# Altium PCB agv_drv.PcbDoc (part 1 of 2)
Units mm, origin at the board's own origin, x right, y up, seen from the top; angles counter-clockwise.
Board outline 86 x 57 mm, 2 copper layers (Top Layer, Bottom Layer); 77 components, 81 nets, 398 pads, 169 vias.
Unrouted connection lines stored in the file: 11.
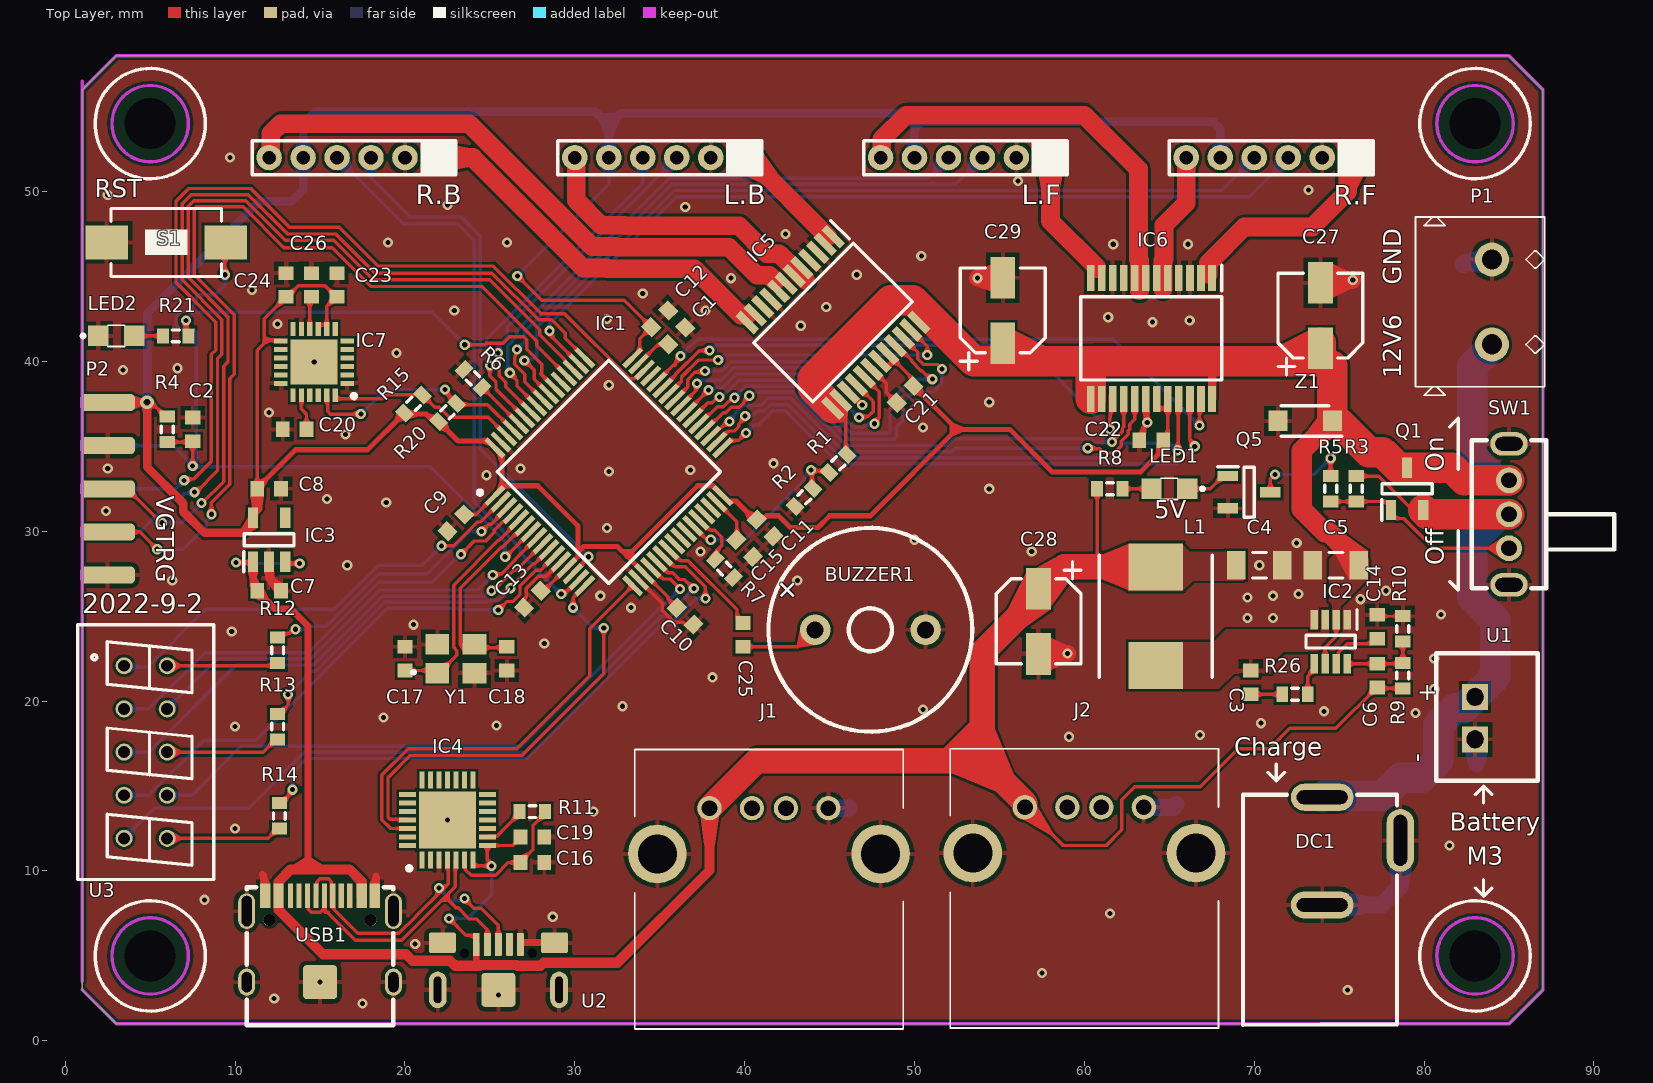
[diagram p0: Top Layer view]
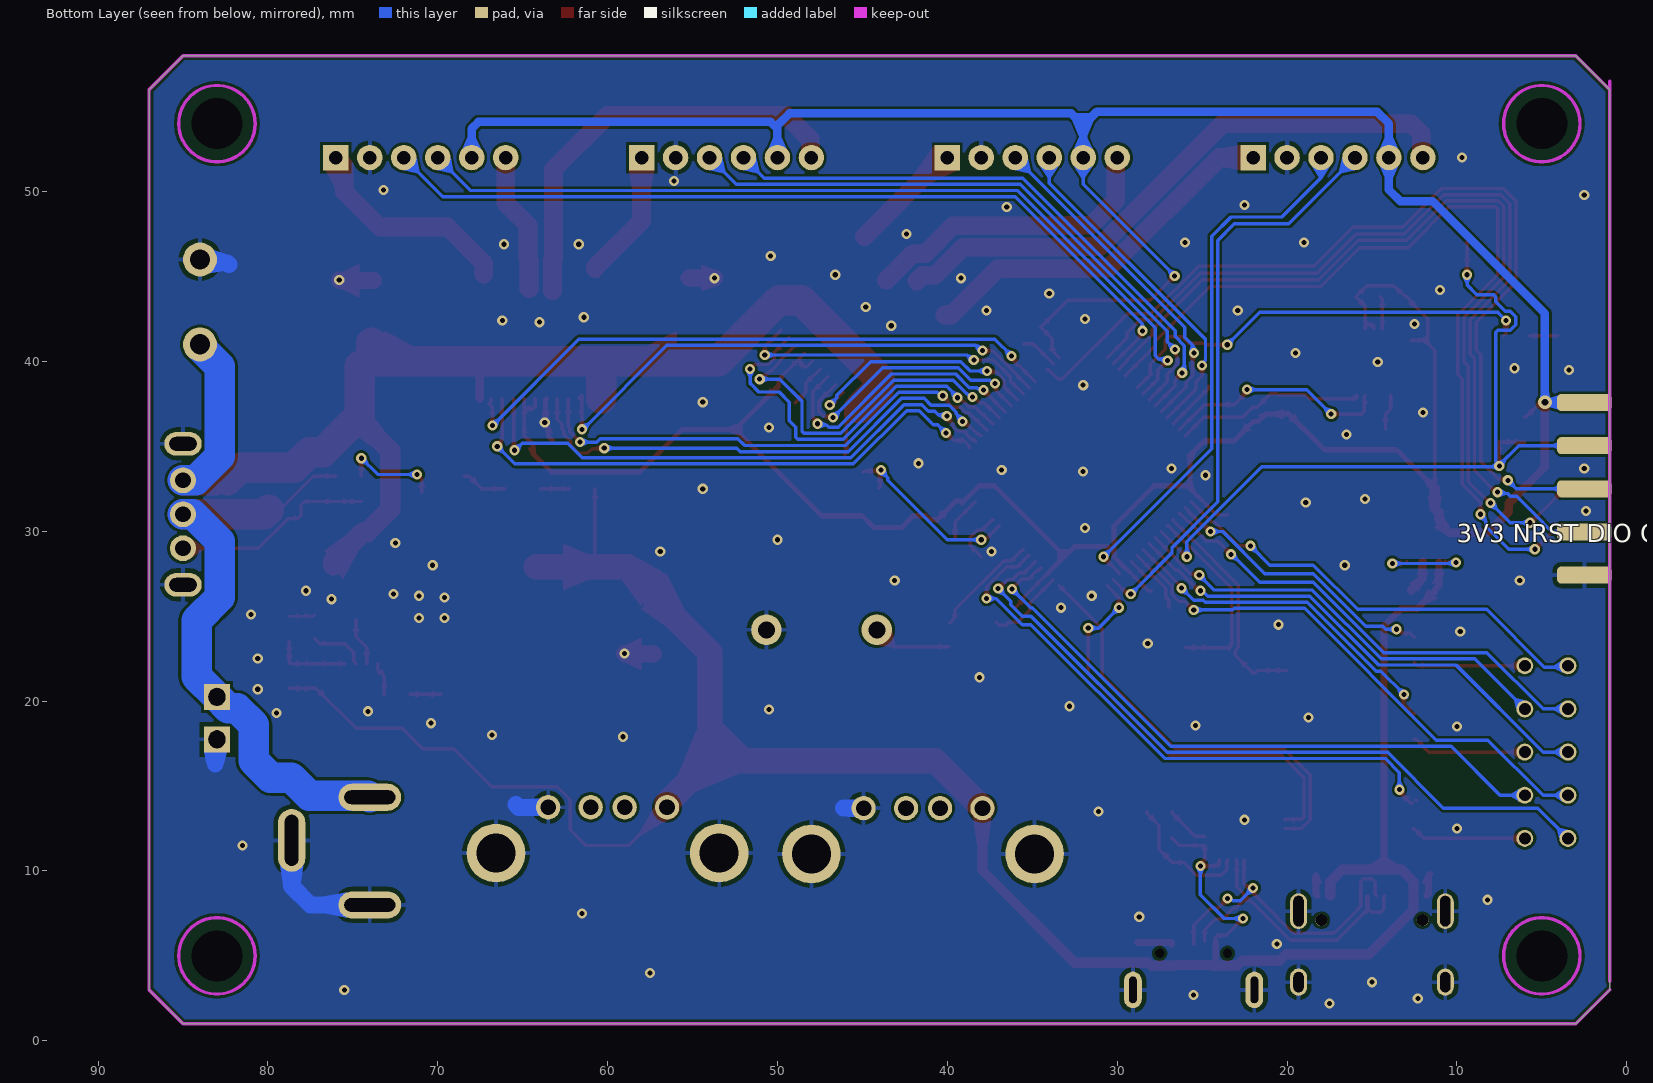
[diagram p1: Bottom Layer view, seen from below]

## Layer stack, top to bottom
Top Solder: solder mask 0.0102, Solder Resist, Dk 3.5
Top Layer: signal copper 0.0356
Dielectric 1: dielectric 0.32, FR-4, Dk 4.8
Bottom Layer: signal copper 0.0356
Bottom Solder: solder mask 0.0102, Solder Resist, Dk 3.5

## Board outline
1,3 1,56 3,58 85,58 87,56 87,3 85,1 3,1

## Design rules (kind name [scope] priority, off if disabled: settings)
Clearance [All] p1: gap=0.16 ignorepadtopadclearanceinfootprint=FALSE
DiffPairsRouting [All] p1: maxlimit=0.5 minlimit=0.16 mostfreqgap=0.2 toplayer_minwidth=0.16 toplayer_maxwidth=0.2 toplayer_prefwidth=0.2 bottomlayer_minwidth=0.16 bottomlayer_maxwidth=0.2 bottomlayer_prefwidth=0.2 maxuncoupledlength=12.7
PlaneConnect [All] p1: pad.planeconnectstyle=Relief pad.reliefexpansion=0.508 pad.reliefentries=4 pad.reliefconductorwidth=0.254 pad.reliefairgap=0.254 via.planeconnectstyle=Direct via.reliefexpansion=0.508 via.reliefentries=4 via.reliefconductorwidth=0.254 via.reliefairgap=0.254
PolygonConnect PolygonConnect_1 [HasFootprint('INDPM7266X300N')] p1: thpad.connectstyle=Relief thpad.reliefconductorwidth=0.254 thpad.reliefentries=4 thpad.polygonreliefangle="90 Angle" thpad.airgapwidth=0.254 smdpad.connectstyle=Direct smdpad.reliefconductorwidth=0.254 smdpad.reliefentries=4 smdpad.polygonreliefangle="90 Angle" smdpad.airgapwidth=0.254 via.connectstyle=Direct via.reliefconductorwidth=0.254 via.reliefentries=4 via.polygonreliefangle="90 Angle" via.airgapwidth=0.254
PolygonConnect PolygonConnect_2 [HasFootprint('C1206')] p2: thpad.connectstyle=Relief thpad.reliefconductorwidth=0.254 thpad.reliefentries=4 thpad.polygonreliefangle="90 Angle" thpad.airgapwidth=0.254 smdpad.connectstyle=Direct smdpad.reliefconductorwidth=0.254 smdpad.reliefentries=4 smdpad.polygonreliefangle="90 Angle" smdpad.airgapwidth=0.254 via.connectstyle=Direct via.reliefconductorwidth=0.254 via.reliefentries=4 via.polygonreliefangle="90 Angle" via.airgapwidth=0.254
PolygonConnect PolygonConnect_3 [HasFootprint('SOT65P280X100-8N')] p3: thpad.connectstyle=Relief thpad.reliefconductorwidth=0.254 thpad.reliefentries=4 thpad.polygonreliefangle="90 Angle" thpad.airgapwidth=0.254 smdpad.connectstyle=Direct smdpad.reliefconductorwidth=0.254 smdpad.reliefentries=4 smdpad.polygonreliefangle="90 Angle" smdpad.airgapwidth=0.254 via.connectstyle=Direct via.reliefconductorwidth=0.254 via.reliefentries=4 via.polygonreliefangle="90 Angle" via.airgapwidth=0.254
PolygonConnect [All] p4: thpad.connectstyle=Relief thpad.reliefconductorwidth=0.254 thpad.reliefentries=4 thpad.polygonreliefangle="90 Angle" thpad.airgapwidth=0.254 smdpad.connectstyle=Relief smdpad.reliefconductorwidth=0.254 smdpad.reliefentries=4 smdpad.polygonreliefangle="90 Angle" smdpad.airgapwidth=0.254 via.connectstyle=Direct via.reliefconductorwidth=0.254 via.reliefentries=4 via.polygonreliefangle="90 Angle" via.airgapwidth=0.254
RoutingVias [All] p1: holewidth=0.4 width=0.8 viastyle="Through Hole" minholewidth=0.3 minwidth=0.6 maxholewidth=6 maxwidth=6
SolderMaskExpansion [All] p1: expansion=0.102 istentingtop=FALSE
Width [All] p1: maxlimit=2 minlimit=0.16 preferedwidth=0.2
28 further rules are at their usual default settings.

## Classes and differential pairs
differential pair XALT: +XALT_P -XALT_N
differential pair USB_D: +USB_D_P -USB_D_N

## Components (designator, comment, footprint, x,y, rotation, side; value= is the part's Value field where it differs from the comment)
BUZZER1 "TMB12A05" BUZ-TH_BD12.5-P6.50-D0.8-FD 47.4,24.2 r0 top
C1 "225" 1608[0603] 36,41.5 r45 top
C2 "104" 1608[0603] 7.5,36 r270 top
C3 "104" 1608[0603] 69.8,21.1 r270 top
C4 "226" C1206 70.3,28 r180 top
C5 "226" C1206 74.8,28 r0 top
C6 "221" 1608[0603] 77.25,21.5 r90 top
C7 "225" 1608[0603] 12,26.5 r180 top
C8 "225" 1608[0603] 12,32.5 r180 top
C9 "104" 1608[0603] 23,30.5 r45 top
C10 "104" 1608[0603] 36.5,25 r135 top
C11 "104" 1608[0603] 41.2,30.2 r135 top
C12 "104" 1608[0603] 35,42.5 r225 top
C13 "225" 1608[0603] 27.5,26 r45 top
C14 "105" 1608[0603] 77.246,24.373 r90 top
C15 "225" 1608[0603] 40,29 r315 top
C16 "105" 1608[0603] 27.5,10.5 r0 top
C17 "10pF" 1608[0603] 20,22.5 r90 top
C18 "10pF" 1608[0603] 26,22.5 r90 top
C19 "105" 1608[0603] 27.5,12 r0 top
C20 "104" 1608[0603] 13.5,36 r180 top
C21 "104" 1608[0603] 49.443,38.057 r225 top
C22 "104" 1608[0603] 63.939,35.354 r180 top
C23 "104" 1608[0603] 16,44.5 r270 top
C24 "104" 1608[0603] 13,44.5 r270 top
C25 "105" 1608[0603] 39.9,23.9 r90 top
C26 "104" 1608[0603] 14.5,44.5 r270 top
C27 "22uF/35V" CAPAE5550X54L 73.9,42.7 r90 top
C28 "100uF/10V" CAPAE5550X54L 57.3,24.7 r270 top
C29 "22uF/35V" CAPAE5550X54L 55.2,43 r90 top
DC1 "DC-005A-2.5A-2.5" DC-IN-TH_DC-005A-2.5A-2.5 76.3,11.17 r90 top locked
IC1 "STM32F405RGT6TR" QFP50P1200X1200X160-64N 32,33.5 r45 top
IC2 "MP2236GJ-Z" SOT65P280X100-8N 74.5,23.5 r270 top
IC3 "ME6211C33" SOT95P282X145-5N 12,29.5 r90 top
IC4 "CP2102" QFN50P500X500X100-29N-D 22.5,13 r90 top
IC5 "TB6612FNG" SOP65P760X160-24N 45.2,42.3 r315 top
IC6 "TB6612FNG" SOP65P760X160-24N 63.939,41.354 r270 top
IC7 "MPU-6050" QFN50P400X400X95-25N 14.646,39.96 r180 top
J1 "1001-001-01000" 100100101000 37.93,13.7 r0 top locked
J2 "1001-001-01000" 100100101000 56.5,13.75 r0 top
L1 "10uH" INDPM7266X300N 64.2,25 r90 top
L.B "Header 6H" HDR2.0-LI-6P 35,52 r180 top
L.F "Header 6H" HDR2.0-LI-6P 53,52 r180 top
LED1 "LED0805" LED0805 65,32.5 r180 top
LED2 "LED0805" LED0805 3,41.5 r0 top
P1 "Header 2" PINSOCKET_1X02_P5.00MM 84,41 r90 top locked
P2 "PinHeader_2X05" SIDEPINHEADER_2X05_P2.54MM 0.9,32.5 r0 top locked
Q1 "AO3401A" SOT95P280X125-3N 79,32.5 r90 top
Q5 "MMBT3904-TP" SOT95P280X125-3N 69.7,32.3 r0 top
R1 "100k" J1-0603 45.5,34 r45 top
R2 "10k" J1-0603 43.5,32 r45 top
R3 "100k" J1-0603 76,32.5 r270 top
R4 "10k" J1-0603 6,36 r90 top
R5 "100k" J1-0603 74.5,32.5 r270 top
R6 "10k" J1-0603 24,39 r315 top
R7 "10k" J1-0603 38.8,27.8 r135 top
R8 "10k" J1-0603 61.5,32.5 r180 top
R9 "100k" J1-0603 78.75,21.5 r270 top
R10 "13.3k" J1-0603 78.75,24.25 r270 top
R11 "10k" J1-0603 27.5,13.5 r0 top
R12 "330" J1-0603 12.5,23 r270 top
R13 "330" J1-0603 12.5,18.5 r270 top
R14 "330" J1-0603 12.61,13.24 r270 top
R15 "3.3k" J1-0603 20.5,37.5 r225 top
R20 "3.3k" J1-0603 22.5,37 r225 top
R21 "10k" J1-0603 6.5,41.5 r0 top
R26 "10" J1-0603 72.4,20.4 r180 top
R.B "Header 6H" HDR2.0-LI-6P 17,52 r180 top
R.F "Header 6H" HDR2.0-LI-6P 71,52 r180 top
S1 "SW-PB" SW_PB2_A1 6,47 r90 top
SW1 "SK12D07VG4" SW-TH_SK12D07VG4 85,31 r90 top locked
U1 "XH2.54-2P" CONN-TH_XH2.54-2P 83,19 r270 top
U2 "Micro_USB" MicroUSB 25.5,3 r90 top
U3 "DigLed-3" DIGLED-3-0.25INCH 3.46,17 r270 top locked
USB1 "TYPEC-304-BCP16" USB-C-SMD_TYPEC-304-BCP16 15,6 r0 top
Y1 "SMD-3225_4P_12MHZ" SMD3225_4P12288MHZ12PF10PPM4085 23,22.5 r0 top
Z1 "SMF12A" SODFL3718X108N 73,36.5 r180 top

## Footprints (in the part's own frame and the unit in brackets; to place one, negate y for a bottom-side part, rotate by r counter-clockwise, add the part's x,y. Pads: shape width x height; smd on the part's side, far side on the other; paste and mask are expansions set on the pad)
1608[0603] [mm] "Chip Capacitor, Body 1.6x0.8mm, IPC High Density"
  rect 0.8x0.9 smd: 1(-0.7,0) 2(0.7,0)
  body extent -0.87,-0.48 0.88,0.47, height 1.3
100100101000 [mm]
  round 1.431 hole 0.92: 1(0,0) 2(2.5,0) 3(4.5,0) 4(7,0)
  round 3.45 hole 2.3: MH1(-3.07,-2.7) MH2(10.07,-2.7)
  silkscreen extent -4.4,-13 11.4,3.45, body extent -4.4,-13 11.4,3.45, height 7.25
BUZ-TH_BD12.5-P6.50-D0.8-FD [mm]
  round 1.8 hole 1: 1(-3.25,0) 2(3.25,0)
  silkscreen extent -6,-6 6,6, body extent -4.25,-1 4.25,1, height 10
C1206 [mm] "Chip Capacitor, Body 3.2x1.6mm, IPC High Density"
  rect 1.1x1.7 smd: 1(-1.35,0) 2(1.35,0)
  silkscreen extent -0.4,-0.75 0.4,0.75, body extent -1.7,-0.9 1.7,0.9, height 1.3
CAPAE5550X54L [mm] "Aluminum Electrolytic Capacitor, Body 5.00x5.00x5.40mm, IPC High Density"
  rect 2.45x1.45 smd: 1(-1.925,0) 2(1.925,0)
  silkscreen extent -3.5,-2.5 2.5,2.5, body extent -2.5,-2.5 2.5,2.5, height 5.4
CONN-TH_XH2.54-2P [mil]
  rect 60x60 hole 39.37 slot 41.34 at 0 deg: 1(-49.22,0) 2(49.21,0)
  silkscreen extent -150,-90 145,145
DC-IN-TH_DC-005A-2.5A-2.5 [mm]
  oval 1.6x3.7 hole 0.8 slot 3 at 90 deg: 1(3.17,2.3) 3(-3.17,2.3)
  oval 3.7x1.6 hole 0.8 slot 3 at 0 deg: 2(0.63,-2.3)
  silkscreen extent -10.24,-2.11 3.31,6.96
DIGLED-3-0.25INCH [mm] "三位数码管 0.25寸"
  round 1 hole 0.7: 1(-5.08,0) 2(-2.54,0) 3(0,0) 4(2.54,0) 5(5.08,0) 6(5.08,2.54) 7(2.54,2.54) 8(0,2.54) 9(-2.54,2.54) 10(-5.08,2.54)
  silkscreen extent -7.5,-2.73 7.5,5.27
HDR2.0-LI-6P [mm] "ֱ�壬�žࣺ2.0mm ��װ�������Ա���� ID���ƾ���ʯ"
  rect 1.5x1.5 hole 0.8: 1(-5,0)
  round 1.5 hole 0.8: 2(-3,0) 3(-1,0) 4(1,0) 5(3,0) 6(5,0)
  silkscreen extent -6,-1 6,1, body extent -6,-1 6,1, height 6.5
INDPM7266X300N [mm]
  rect 2.75x3.2 smd: 1(-2.9,0) 2(2.9,0)
  silkscreen extent -3.6,-3.32 3.6,3.32, body extent -3.6,-3.32 3.6,3.32, height 3
J1-0603 [mm] "Chip Resistor, Body 1.6x0.8mm, IPC High Density"
  rect 0.7x0.9 smd: 1(-0.75,0) 2(0.75,0)
  silkscreen extent -0.2,-0.35 0.2,0.35, body extent -0.85,-0.47 0.85,0.47, height 0.9
LED0805 [mm]
  rect 1.2x1.2 smd: 1(1.05,0) 2(-1.05,0)
  silkscreen extent -2.05,-0.63 0.5,0.63
MicroUSB [mm]
  rrect20% 1.35x0.4 smd: 1(2.675,1.3) 2(2.675,0.65) 3(2.675,0) 4(2.675,-0.65) 5(2.675,-1.3)
  round 0 hole 0.55 unplated: 7(2.15,-2) 7(2.15,2)
  oval 2.15x1.05 hole 0.45 slot 1.55 at 0 deg: SH(0,3.575) SH(0,-3.575)
  rrect20% 2x2 smd: SH(0,0)
  rrect20% 1.2x1.6 smd: SH(2.775,3.3) SH(2.775,-3.3)
  body extent -1.45,-4.1 3,4, height 2
PINSOCKET_1X02_P5.00MM [mm] "螺钉式接线端子5mm"
  round 2 hole 1.2: 1(0,0) 2(5,0)
  silkscreen extent -3,-3.1 7.5,4.5, body extent -2.5,-3.1 7.1,4.5, height 10
QFN50P400X400X95-25N [mm]
  rect 0.8x0.3 smd: 1(-1.95,1.25) 2(-1.95,0.75) 3(-1.95,0.25) 4(-1.95,-0.25) 5(-1.95,-0.75) 6(-1.95,-1.25) 13(1.95,-1.25) 14(1.95,-0.75) 15(1.95,-0.25) 16(1.95,0.25) 17(1.95,0.75) 18(1.95,1.25)
  rect 0.3x0.8 smd: 7(-1.25,-1.95) 8(-0.75,-1.95) 9(-0.25,-1.95) 10(0.25,-1.95) 11(0.75,-1.95) 12(1.25,-1.95) 19(1.25,1.95) 20(0.75,1.95) 21(0.25,1.95) 22(-0.25,1.95) 23(-0.75,1.95) 24(-1.25,1.95)
  rect 2.75x2.65 smd: 25(0,0)
  silkscreen extent -2.48,1.88 -2.23,2.12, body extent -2.05,-2.05 2.05,2.05, height 0.95
QFN50P500X500X100-29N-D [mm]
  rect 1x0.3 smd: 1(-2.35,1.5) 2(-2.35,1) 3(-2.35,0.5) 4(-2.35,0) 5(-2.35,-0.5) 6(-2.35,-1) 7(-2.35,-1.5) 15(2.35,-1.5) 16(2.35,-1) 17(2.35,-0.5) 18(2.35,0) 19(2.35,0.5) 20(2.35,1) 21(2.35,1.5)
  rect 0.3x1 smd: 8(-1.5,-2.35) 9(-1,-2.35) 10(-0.5,-2.35) 11(0,-2.35) 12(0.5,-2.35) 13(1,-2.35) 14(1.5,-2.35) 22(1.5,2.35) 23(1,2.35) 24(0.5,2.35) 25(0,2.35) 26(-0.5,2.35) 27(-1,2.35) 28(-1.5,2.35)
  rect 3.35x3.35 smd: 29(0,0)
  silkscreen extent -2.97,2.12 -2.73,2.37, body extent -2.55,-2.55 2.55,2.55, height 1
QFP50P1200X1200X160-64N [mm]
  rect 1.475x0.3 smd: 1(-5.738,3.75) 2(-5.738,3.25) 3(-5.738,2.75) 4(-5.738,2.25) 5(-5.738,1.75) 6(-5.738,1.25) 7(-5.738,0.75) 8(-5.738,0.25) 9(-5.738,-0.25) 10(-5.738,-0.75) 11(-5.738,-1.25) 12(-5.738,-1.75) 13(-5.738,-2.25) 14(-5.738,-2.75) 15(-5.738,-3.25) 16(-5.738,-3.75) 33(5.738,-3.75) 34(5.738,-3.25) 35(5.738,-2.75) 36(5.738,-2.25) 37(5.738,-1.75) 38(5.738,-1.25) 39(5.738,-0.75) 40(5.738,-0.25) 41(5.738,0.25) 42(5.738,0.75) 43(5.738,1.25) 44(5.738,1.75) 45(5.738,2.25) 46(5.738,2.75) 47(5.738,3.25) 48(5.738,3.75)
  rect 0.3x1.475 smd: 17(-3.75,-5.738) 18(-3.25,-5.738) 19(-2.75,-5.738) 20(-2.25,-5.738) 21(-1.75,-5.738) 22(-1.25,-5.738) 23(-0.75,-5.738) 24(-0.25,-5.738) 25(0.25,-5.738) 26(0.75,-5.738) 27(1.25,-5.738) 28(1.75,-5.738) 29(2.25,-5.738) 30(2.75,-5.738) 31(3.25,-5.738) 32(3.75,-5.738) 49(3.75,5.738) 50(3.25,5.738) 51(2.75,5.738) 52(2.25,5.738) 53(1.75,5.738) 54(1.25,5.738) 55(0.75,5.738) 56(0.25,5.738) 57(-0.25,5.738) 58(-0.75,5.738) 59(-1.25,5.738) 60(-1.75,5.738) 61(-2.25,5.738) 62(-2.75,5.738) 63(-3.25,5.738) 64(-3.75,5.738)
  silkscreen extent -6.35,-4.65 4.65,4.65, body extent -6,-6 6,6, height 1.6
SIDEPINHEADER_2X05_P2.54MM [mm] "Side Mount PinHeader P2.54mm"
  rrect50% 3.2x1 smd far side paste-2539.97: 1(1.6,5.08) 2(1.6,2.54) 3(1.6,0) 4(1.6,-2.54) 5(1.6,-5.08)
  rrect50% 3.2x1 smd paste-2539.97: 6(1.6,-5.08) 7(1.6,-2.54) 8(1.6,0) 9(1.6,2.54) 10(1.6,5.08)
SMD3225_4P12288MHZ12PF10PPM4085 [mm]
  rect 1.4x1.2 smd: 1(-1.1,-0.85) 2(1.1,-0.85) 3(1.1,0.85) 4(-1.1,0.85)
  silkscreen extent -2.6,-0.9 -2.4,-0.7, body extent -1.68,-1.33 1.68,1.33, height 0.9
SODFL3718X108N [mm]
  rect 1.12x1.22 smd: 1(-1.6,0) 2(1.6,0)
  silkscreen extent -2.16,-0.9 1.4,0.9, body extent -1.85,-0.9 1.85,0.9, height 1.08
SOP65P760X160-24N [mm]
  rect 1.525x0.45 smd: 1(-3.562,3.575) 2(-3.562,2.925) 3(-3.562,2.275) 4(-3.562,1.625) 5(-3.562,0.975) 6(-3.562,0.325) 7(-3.562,-0.325) 8(-3.562,-0.975) 9(-3.562,-1.625) 10(-3.562,-2.275) 11(-3.562,-2.925) 12(-3.562,-3.575) 13(3.562,-3.575) 14(3.562,-2.925) 15(3.562,-2.275) 16(3.562,-1.625) 17(3.562,-0.975) 18(3.562,-0.325) 19(3.562,0.325) 20(3.562,0.975) 21(3.562,1.625) 22(3.562,2.275) 23(3.562,2.925) 24(3.562,3.575)
  silkscreen extent -4.32,-4.15 2.45,4.15, body extent -3.8,-4.15 3.8,4.15, height 1.6
SOT65P280X100-8N [mm]
  rect 1.15x0.45 smd: 1(-1.3,0.975) 2(-1.3,0.325) 3(-1.3,-0.325) 4(-1.3,-0.975) 5(1.3,-0.975) 6(1.3,-0.325) 7(1.3,0.325) 8(1.3,0.975)
  silkscreen extent -1.87,-1.45 0.38,1.55, body extent -1.4,-1.45 1.4,1.45, height 1
SOT95P280X125-3N [mm]
  rect 1.2x0.6 smd: 1(-1.25,0.95) 2(-1.25,-0.95) 3(1.25,0)
  silkscreen extent -1.85,-1.48 0.3,1.5, body extent -1.4,-1.48 1.4,1.48, height 1.25
SOT95P282X145-5N [mm]
  rect 1.2x0.6 smd: 1(-1.3,0.95) 2(-1.3,0) 3(-1.3,-0.95) 4(1.3,-0.95) 5(1.3,0.95)
  silkscreen extent -1.9,-1.47 0.35,1.5, body extent -1.41,-1.47 1.41,1.47, height 1.45
SW-TH_SK12D07VG4 [mil]
  round 60 hole 36: 1(-78.74,0) 2(0,0) 3(78.74,0)
  oval 55.12x86.61 hole 31.5 slot 62.99 at 90 deg: 4(163.38,0) 5(-163.39,0)
  silkscreen extent -171,-244 171,87
SW_PB2_A1 [mm]
  rect 2x2.5 smd: 1(0,3.556) 2(0,-3.444)
  silkscreen extent -2,-3.19 2,3.31, body extent -2.03,-3.17 2.03,3.3, height 1.2
USB-C-SMD_TYPEC-304-BCP16 [mm]
  oval 1x2.1 hole 0.6 slot 1.8 at 90 deg: 13(-4.32,1.633) 14(4.32,1.633)
  oval 1x1.6 hole 0.6 slot 1.2 at 90 deg: 15(-4.32,-2.547) 16(4.32,-2.547)
  rrect20% 2x2 smd: 15(0,-2.547)
  rect 0.6x1.45 smd: A1B12(-3.225,2.547) A4B9(-2.45,2.547) B1A12(3.22,2.547) B4A9(2.45,2.547)
  rect 0.3x1.45 smd: A5(-1.25,2.547) A6(-0.25,2.547) A7(0.25,2.547) A8(1.25,2.547) B5(1.75,2.547) B6(0.75,2.547) B7(-0.75,2.547) B8(-1.75,2.547)
  round 0.7 hole 0.7 unplated: ""(-2.98,1.102) ""(2.98,1.102)
  silkscreen extent -4.32,-5.08 4.32,3.05

## Part data
BUZZER1: BOM_JLCPCB Part Class="Extended Part", BOM_Manufacturer=HNDZ, BOM_Manufacturer Part=TMB12A05, BOM_Supplier=LCSC, BOM_Supplier Part=C96093, spicePre=B, spiceSymbolName=TMB12A05
C1 C2 C3 C4 C5 C6 C7 C8 C9 C10 C11 C12 C13 C14 C15 C16 C17 C18 C19 C20 C21 C22 C23 C24 C25 C26: library part "Cap Semi", "Capacitor (Semiconductor SIM Model)", LatestRevisionDate=29-May-2009, LatestRevisionNote="IPC-7351 Footprint Added.", PackageDescription="Chip Capacitor", PackageReference=C1206, Published=8-Jun-2000, Publisher="Altium Limited"
C27 C28 C29: library part "Cap Pol1", "Polarized Capacitor (Radial)", LatestRevisionDate=17-Jul-2002, LatestRevisionNote="Re-released for DXP Platform.", PackageDescription="Polarized Capacitor (Radial); 2 Leads", PackageReference=RB7.6-15, Published=8-Jun-2000, Publisher="Altium Limited"
DC1: BOM_JLCPCB Part Class="Extended Part", BOM_Manufacturer="XKB Connectivity(中国星坤)", BOM_Manufacturer Part=DC-005A-2.5A-2.5, BOM_Supplier=LCSC, BOM_Supplier Part=C480364, Contributor=LCSC, spicePre=D, spiceSymbolName=DC-005A-2.5A-2.5
IC1: "Integrated Circuit", Manufacturer_Name=STMicroelectronics, Mouser Part Number=511-STM32F405RGT6TR, Arrow Part Number=STM32F405RGT6TR, Arrow Price/Stock=https://www.arrow.com/en/products/stm32f405rgt6tr/stmicroelectronics?region=nac, Datasheet Link=http://www.st.com/web/en/resource/technical/document/datasheet/DM00037051.pdf, Height=1.6mm, Manufacturer_Part_Number=STM32F405RGT6TR, Mouser Price/Stock=https://www.mouser.co.uk/ProductDetail/STMicroelectronics/STM32F405RGT6TR?qs=MavH1QghrkHshpR6GkvPIg%3D%3D
IC2: "Integrated Circuit", Manufacturer_Name="Monolithic Power Systems (MPS)", Mouser Part Number=946-MP2236GJ-Z, Datasheet Link=https://www.mouser.in/datasheet/2/277/MP2236-2945671.pdf, Height=1mm, Manufacturer_Part_Number=MP2236GJ-Z, Mouser Price/Stock=https://www.mouser.co.uk/ProductDetail/Monolithic-Power-Systems-MPS/MP2236GJ-Z?qs=Zz7%252BYVVL6bGyotdSEmskgA%3D%3D
IC3: library part ME6211C33M5G, "Integrated Circuit", Manufacturer_Name=Microne, Datasheet Link=http://xinhuidianzi.com.cn/UploadSysFiles/files/LDO-series/ME6211-Series_E15.0.pdf, Height=1.45mm, Manufacturer_Part_Number=ME6211C33M5G
IC4: "Integrated Circuit", Manufacturer_Name="Silicon Labs", Mouser Part Number=634-CP2102, Datasheet Link=https://componentsearchengine.com/Datasheets/1/CP2102.pdf, Height=1mm, Manufacturer_Part_Number=CP2102, Mouser Price/Stock=https://www.mouser.co.uk/ProductDetail/Silicon-Labs/CP2102?qs=ucY0lxHzU7615lOm95XT0w%3D%3D
IC5 IC6: "Integrated Circuit", Manufacturer_Name=Toshiba, Datasheet Link=https://datasheet.datasheetarchive.com/originals/distributors/SFDatasheet-6/sf-000138015.pdf, Height=1.6mm, Manufacturer_Part_Number=TB6612FNG
IC7: "Integrated Circuit", Manufacturer_Name=TDK, Mouser Part Number=410-MPU-6050, Arrow Part Number=MPU-6050, Arrow Price/Stock=https://www.arrow.com/en/products/mpu-6050/invensense?region=nac, Datasheet Link=https://datasheet.lcsc.com/szlcsc/TDK-InvenSense-MPU-6050_C24112.pdf, Height=0.95mm, Manufacturer_Part_Number=MPU-6050, Mouser Price/Stock=https://www.mouser.co.uk/ProductDetail/TDK-InvenSense/MPU-6050?qs=u4fy%2FsgLU9O14B5JgyQFvg%3D%3D
J1 J2: "Connector", Manufacturer_Name="CNC Tech", Datasheet Link=http://www.cnctech.us/pdfs/1001-001-01000_.pdf, Height=7.15mm, Manufacturer_Part_Number=1001-001-01000
L1: library part ASPI-0630HI-4R7M-T15, "Inductor", Manufacturer_Name=ABRACON, Mouser Part Number=815-ASPI0630HI4R7T15, Arrow Part Number=ASPI-0630HI-4R7M-T15, Arrow Price/Stock=https://www.arrow.com/en/products/aspi-0630hi-4r7m-t15/abracon, Datasheet Link=https://abracon.com/Support/PackageDrawing/Magnetics/ASPI-0630HI.PDF, Height=3mm, Manufacturer_Part_Number=ASPI-0630HI-4R7M-T15, Mouser Price/Stock=https://www.mouser.com/Search/Refine.aspx?Keyword=815-ASPI0630HI4R7T15
L.B L.F R.B R.F: "Header, 6-Pin, Right Angle", LatestRevisionDate=17-Jul-2002, LatestRevisionNote="Re-released for DXP Platform.", Publisher="Altium Limited"
LED1 LED2: library part LED, "LED", Arrow Part Number=17-21SURC/S530-A3/TR8, Manufacturer_Name=Everlight, Mouser Part Number=638-1721SURCS530A3, Arrow Price/Stock=https://www.arrow.com/en/products/17-21surcs530-a3tr8/everlight-electronics?region=nac, Datasheet Link=https://everlighteurope.com/index.php?controller=attachment?id_attachment=6172, Manufacturer_Part_Number=17-21SURC/S530-A3/TR8, Mouser Price/Stock=https://www.mouser.co.uk/ProductDetail/Everlight/17-21SURC-S530-A3-TR8?qs=8PzhAHr7IdPIULW1xNE5Hw%3D%3D
P1: "Header, 2-Pin", LatestRevisionDate=17-Jul-2002, LatestRevisionNote="Re-released for DXP Platform.", Publisher="Altium Limited"
Q1: "MOSFET (P-Channel)", Manufacturer_Name="Alpha & Omega Semiconductors", Arrow Part Number=AO3401A, Arrow Price/Stock=https://www.arrow.com/en/products/ao3401a/alpha-and-omega-semiconductor?region=nac, Datasheet Link=http://www.aosmd.com/pdfs/datasheet/AO3401A.pdf, Height=1.25mm, Manufacturer_Part_Number=AO3401A
Q5: "Transistor BJT NPN", Manufacturer_Name="Micro Commercial Components (MCC)", Mouser Part Number=833-MMBT3904-TP, Arrow Part Number=MMBT3904-TP, Arrow Price/Stock=https://www.arrow.com/en/products/mmbt3904-tp/micro-commercial-components, Datasheet Link=https://componentsearchengine.com/Datasheets/1/MMBT3904-TP.pdf, Manufacturer_Part_Number=MMBT3904-TP, Mouser Price/Stock=https://www.mouser.co.uk/ProductDetail/Micro-Commercial-Components-MCC/MMBT3904-TP?qs=KFo7JewZbUHicjDjIayULQ%3D%3D
R1 R2 R3 R4 R5 R6 R7 R8 R9 R10 R11 R12 R13 R14 R15 R20 R21 R26: library part Res3, "Resistor", LatestRevisionDate=29-May-2009, LatestRevisionNote="IPC-7351 Footprint Added.", PackageDescription="Chip Resistor", PackageReference=J1-0603, Published=8-Jun-2000, Publisher="Altium Limited"
S1: "Switch", LatestRevisionDate=17-Jul-2002, LatestRevisionNote="Re-released for DXP Platform.", PackageDescription="Switch; 2 Leads", PackageReference=SPST-2, Published=24-Mar-1999, Publisher="Altium Limited"
SW1: BOM_JLCPCB Part Class="Extended Part", BOM_Manufacturer="SHOU HAN", BOM_Manufacturer Part=SK12D07VG4, BOM_Supplier=LCSC, BOM_Supplier Part=C393937, Contributor=LCSC, spicePre=S, spiceSymbolName=SK12D07VG4
U1: BOM_JLCPCB Part Class="Extended Part", BOM_Manufacturer=null, BOM_Manufacturer Part=XH2.54-2P立式座子, BOM_Supplier=LCSC, BOM_Supplier Part=C2888344, Contributor=LCSC, spicePre=U, spiceSymbolName=XH2.54-2P立式座子
U2: "micro USB B型座子"
U3: "共阳极三位数码管"
USB1: BOM_JLCPCB Part Class="Extended Part", BOM_Manufacturer=XUNPU, BOM_Manufacturer Part=TYPEC-304-BCP16, BOM_Supplier=LCSC, BOM_Supplier Part=C720629, Contributor=LCSC, spicePre=U, spiceSymbolName=TYPEC-304-BCP16
Y1: library part SMD-3225_4P_12.288MHZ_12PF_10PPM_-40~+85, "Crystal or Oscillator", Manufacturer_Name="TAE(Zhejiang Abel Elec)", Manufacturer_Part_Number="SMD-3225_4P 12.288MHZ 12PF 10PPM -40~+85¡æ", Datasheet Link=https://datasheet.lcsc.com/szlcsc/1901241506_Zhejiang-Abel-Elec-SMD-3225-4P-12-288MHZ-12PF-10PPM-40-85_C362472.pdf, Height=0.8mm
Z1: library part SMF24A-E3-08, "Zener Diode", Manufacturer_Name=Vishay, Mouser Part Number=78-SMF24A-E3-08, Arrow Part Number=SMF24A-E3-08, Arrow Price/Stock=https://www.arrow.com/en/products/smf24a-e3-08/vishay?region=nac, Datasheet Link=https://datasheet.datasheetarchive.com/originals/distributors/Datasheets-DGA26/1842521.pdf, Height=1.08mm, Manufacturer_Part_Number=SMF24A-E3-08, Mouser Price/Stock=https://www.mouser.co.uk/ProductDetail/Vishay-Semiconductors/SMF24A-E3-08?qs=EyVtPm1F4imZcejQQ1SSmA%3D%3D

## Free pads (board coordinates)
  round 0 hole 3 unplated: 2(5,5) 2(5,54) 2(83,5) 2(83,54)

## Via types
v1: diameter 0.6, hole 0.3, Top Layer to Bottom Layer, tented both sides, 160 vias
v2: diameter 0.6, hole 0.3, Top Layer to Bottom Layer, 8 vias
v3: diameter 0.8, hole 0.4, Top Layer to Bottom Layer, 1 vias

## Nets (pads, with @x,y where several pads share a name; then routed paths per layer and width w, separated by ;. In a path a pad name is that pad's centre, name@x,y a point inside that pad or via, vN(x,y) a via of type N, cw(c..) or ccw(c..) an arc to the next point about the centre after c; other vN are vias at no path point)
3V3: C8.2 C9.2 C10.2 C11.2 C12.2 C13.2 C21.1 C22.1 C23.2 C24.2 IC1.1 IC1.13 IC1.19 IC1.32 IC1.48 IC1.64 IC3.5 IC5.19 IC5.20 IC6.19 IC6.20 IC7.8 IC7.9 IC7.13 L.B.5 L.F.5 P2.1 P2.10 R4.2 R15.2 R20.2 R.B.5 R.F.5 | length 232.8
  Top Layer w0.2: v3(4.812,37.6) 5.05,37.6 5.9,36.75 R4.2 ; C8.2@11.3,32.55 11.3,40.66 11.893,41.253 ; IC7.13 12.653,41.253 11.893,41.253 ; IC7.9 14.896,42.126 14.946,42.176 15.229,42.176 15.297,42.108 IC7.8@15.396,42.108 ; IC7.8 IC7.8@15.396,42.108 ; C9.2 23.53,30.96 23.955,30.96 23.99,30.995 24.192,30.995 IC1.1 ; v1(26.614,45.034) 28.044,43.605 32.905,43.605 C12.2 33.821,41.321 33.821,40.624 IC1.48 ; C13.2 28.177,26.495 IC1.13 ; IC1.19 35.505,26.106 35.505,25.995 C10.2 ; IC5.19 48.267,39.693 48.444,39.693 48.726,39.976 IC5.20@48.726,40.153 ; IC5.20 IC5.20@48.726,40.153 ; C21.1 49.938,38.941 IC5.20@48.726,40.153 ; IC6.19 64.264,37.342 64.389,37.217 64.789,37.217 IC6.20@64.914,37.342 ; C22.1 64.914,35.629 IC6.20@64.914,37.342 ; IC6.20 IC6.20@64.914,37.342 ; 11.893,41.253 11.709,41.437 11.709,42.509 12.65,43.45 12.65,43.5 12.95,43.8 C24.2 13.347,44.1 13.347,44.107 ccw(c4.961,53.212) 13.714,44.46 15.29,44.46 15.95,43.8 15.396,43.246 IC7.8@15.396,42.108
  Top Layer w0.3: C8.2 11.3,32.55 13.55,34.8 17.8,34.8 R15.2 20.04,36.899 21.258,36.899 21.687,36.47 R20.2 23.118,35.321 24.876,35.321 IC1.64 25.706,34.49 IC1.1@25.706,32.51 ; IC1.1 IC1.1@25.706,32.51 ; IC1.13 30.176,28.494 30.176,28.748 ; IC1.19 33.082,28.529 ; C11.2@40.64,30.63 39.482,31.788 39.234,31.788 39.124,31.679 38.125,32.678 37.231,32.678 33.082,28.529 ; C11.2 41.059,30.695 41.275,30.911 41.989,30.911 42.682,30.218 44.318,30.218 45.011,30.911 47.401,30.911 52.49,36 ; C21.1 52.49,36 ; C22.1 64.389,35.104 64.389,34.565 63.324,33.5 58.1,33.5 55.6,36 52.49,36 ; IC1.1@25.706,32.51 25.875,32.678 27.822,32.678 30.176,30.324 30.176,28.748 ; 30.176,28.748 30.538,29.11 32.501,29.11 33.082,28.529
  Top Layer w0.4: P2.10 2.51,37.59 4.802,37.59 v3(4.812,37.6) ; IC3.5@10.95,30.4 11.05,30.5 IC3.5
  Top Layer w0.5: v3(4.812,37.6) 4.812,33.788 6.95,31.65 6.95,31.15 8.2,29.9 10.45,29.9 IC3.5@10.95,30.4
  Top Layer w0.6: IC3.5 11.05,31.1 11.3,31.35 C8.2
  Bottom Layer w0.2: v1(26.614,45.034) 32,50.42 L.B.5
  Bottom Layer w0.5: P2.1 2.51,37.59 4.802,37.59 v3(4.812,37.6) 4.812,42.812 11.436,49.437 13.336,49.437 14,50.1 R.B.5 14,54 14.7,54.7 31.2,54.7 32,53.9 ; L.B.5 32,53.9 ; L.F.5 50,53.7 50.4,54.1 67.607,54.1 68,53.707 R.F.5 ; 50,53.9 49.3,54.6 32.7,54.6 32,53.9
BAT_VS: IC1.27 R1.1 R2.2 | length 11.3
  Top Layer w0.2: IC1.27 37.691,29.577 37.923,29.577 v1(38,29.5) ; v1(43.9,33.6) v1@43.96,33.54 ; R2.2 43.96,32.601 v1@43.96,33.54 ; R1.1 44.899,33.54 v1@43.96,33.54
  Bottom Layer w0.2: v1(38,29.5) 40,29.5 43.505,33.005 43.505,33.146 43.9,33.541 v1(43.9,33.6)
BEEP: C25.2 IC1.23 | length 6.4
  Top Layer w0.2: IC1.23 35.598,28.912 36.242,28.268 36.662,28.268 39.55,25.38 39.55,24.9 39.85,24.6 C25.2
BOOT0: IC1.60 R6.2 | length 3.1
  Top Layer w0.2: R6.2@24.628,38.538 24.628,38.397 IC1.60
BOOT1: IC1.28 R7.2 | length 3.2
  Top Layer w0.2: IC1.28 37.366,30.68 37.986,30.06 38.232,30.06 38.644,29.648 38.644,29.352 38.665,29.331 38.665,29.165 R7.2@38,28.5
CP3V3: C16.1 IC4.6 R11.2 | length 7.9
  Top Layer w0.2: IC4.6 23.55,10.6 23.55,10.082 23.892,9.74 25.332,9.74 26.092,10.5 C16.1 26.8,10.55 27.54,11.29 27.54,12.69 28.25,13.4 R11.2
Dig1: IC1.3 R12.1 | length 16.7
  Top Layer w0.2: R12.1 12.75,24 13.211,24 13.442,24.231 v1(13.55,24.231) ; v1(24.513,29.987) 24.943,30.417 25.073,30.417 25.8,31.145 25.8,31.2 25.987,31.387 IC1.3
  Bottom Layer w0.2: v1(13.55,24.231) 14.188,24.231 14.357,24.4 15.354,24.4 18.454,27.5 21.3,27.5 23.787,29.987 v1(24.513,29.987)
Dig2: IC1.10 R13.1 | length 20.7
  Top Layer w0.2: R13.1 12.6,19.25 13.133,19.783 13.133,20.367 v1(13.104,20.396) ; v1(26.214,26.648) 26.214,26.736 27.554,28.076 27.637,28.076 IC1.10
  Bottom Layer w0.2: v1@12.94,20.232 v1(13.104,20.396) 14.475,21.767 14.757,21.767 18.81,25.819 24.82,25.819 24.929,25.928 25.494,25.928 v1(26.214,26.648)
Dig3: IC1.22 R14.1 | length 34.8
  Top Layer w0.2: R14.1@12.375,14.125 R14.1@12.425,14.175 ; R14.1 12.71,13.99 13.305,14.585 13.305,14.709 v1(13.381,14.786) ; IC1.22 35.244,28.559 35.895,27.908 36.513,27.908 37.686,26.736 v1(37.686,26.044)
  Bottom Layer w0.2: v1(13.381,14.786) 13.381,15.781 14.224,16.624 27.206,16.624 35.082,24.5 35.6,24.5 37.144,26.044 v1(37.686,26.044)
DigA: IC1.20 U3.7 | length 37.5
  Top Layer w0.2: IC1.20 34.624,27.694 34.694,27.694 34.7,27.7 35.212,27.188 35.612,27.188 v1(36.2,26.6)
  Bottom Layer w0.2: U3.7 7.46,14.46 10.344,17.344 26.844,17.344 35,25.5 35.1,25.5 v1(36.2,26.6)
DigB: IC1.8 U3.9 | length 26
  Top Layer w0.2: v1(25.17,27.422) 25.246,27.499 25.691,27.499 26.503,28.311 26.503,28.356 IC1.8
  Bottom Layer w0.2: U3.9 8.947,22.487 14.459,22.487 18.512,26.539 24.287,26.539 v1(25.17,27.422)
DigC: IC1.4 U3.2 | length 27.7
  Top Layer w0.2: v1(23.304,28.643) 24.087,29.427 24.745,29.427 25.25,29.932 25.25,30.059 25.754,30.564 25.811,30.564 26.281,31.034 IC1.4
  Bottom Layer w0.2: U3.2 4.925,19.54 8.232,22.847 14.31,22.847 18.464,27 21.6,27 23.243,28.643 v1(23.304,28.643)
DigD: IC1.9 U3.3 | length 29.7
  Top Layer w0.2: v1(25.1,26.5) 25.201,26.5 26.397,27.696 26.549,27.696 IC1.9
  Bottom Layer w0.2: U3.3 4.925,17 10.052,22.127 14.608,22.127 18.661,26.179 24.671,26.179 24.992,26.5 v1(25.1,26.5)
DigE: IC1.11 U3.4 | length 31.6
  Top Layer w0.2: v1(25.491,25.368) 25.987,25.863 26.355,25.863 26.774,26.282 26.774,26.787 27.703,27.716 27.984,27.716 IC1.11
  Bottom Layer w0.2: U3.4 4.925,14.46 8.169,17.704 11.204,17.704 18.959,25.459 23.116,25.459 23.208,25.368 v1(25.491,25.368)
DigF: IC1.2 U3.1 | length 26.3
  Top Layer w0.2: v1(22.151,29.143) 22.877,29.143 24.281,30.547 24.455,30.547 25.645,31.736 IC1.2
  Bottom Layer w0.2: U3.1 3.54,22 4.845,22 8.245,25.4 15.845,25.4 18.445,28 21.008,28 v1(22.151,29.143)
DigG: IC1.21 U3.5 | length 42.6
  Top Layer w0.2: IC1.21 35.477,27.548 35.761,27.548 36.149,27.16 36.432,27.16 36.592,27 36.629,27 v1(37.007,26.623)
  Bottom Layer w0.2: U3.5 3.46,11.96 3.5,12 3.54,12 5.24,13.7 10.791,13.7 14.075,16.984 27.057,16.984 35.073,25 35.591,25 36.261,25.67 36.261,25.869 37.007,26.615 v1(37.007,26.623)
GND: BUZZER1.2 C1.2 C2.1 C4.1 C5.1 C7.1 C8.1 C9.1 C10.1 C11.1 C12.1 C13.1 C14.2 C15.2 C16.2 C17.2 C18.1 C19.2 C20.2 C21.2 C22.2 C23.1 C24.1 C26.1 C27.2 C28.2 C29.2 DC1.2 DC1.3 IC1.12 IC1.18 IC1.63 IC2.1 IC2.4 IC3.2 IC4.3 IC4.29 IC5.3 IC5.4 IC5.9 IC5.10 IC5.18 IC6.3 IC6.4 IC6.9 IC6.10 IC6.18 IC7.1 IC7.11 IC7.18 IC7.25 J1.4 J1.MH1 J1.MH2 J2.4 J2.MH1 J2.MH2 L.B.2 L.F.2 LED2.2 P1.2 P2.5 P2.6 P2.9 Q5.2 R2.1 R6.1 R7.1 R10.1 R.B.2 R.F.2 S1.1 SW1.4 SW1.5 U1.2 U2.5 U2.SH USB1.13 USB1.14 USB1.15 USB1.16 USB1.A1B12 USB1.B1A12 Y1.2 Y1.4 Z1.2 | length 41.6
  Top Layer w0.16: C14.2 77.319,25 R10.1
  Top Layer w0.2: C13.1 26.97,25.54 26.97,25.965 27.134,26.129 27.134,26.638 27.852,27.356 28.331,27.356 IC1.12 ; IC1.18 35.144,25.76 35.144,25.352 35.862,24.634 36.377,24.634 36.538,24.473 36.962,24.473 C10.1@37.124,24.634 ; IC5.18 48.329,38.712 48.329,38.181 C21.2
  Top Layer w0.3: C22.2 63.489,35.604 63.489,36.108 63.7,36.319 v1(63.7,36.4) 63.657,36.443 63.657,37.749 IC6.18
  Top Layer w0.4: 11.6,9.8 11.675,9.725 11.675,8.647 USB1.A1B12 ; USB1.B1A12 18.3,8.628 18.3,9.7 ; U2.5 26.8,5.785 28.79,5.785 U2.SH@28.8,5.775
  Top Layer w0.5: IC3.2 12.05,28.15 12.05,27.2 12.7,26.55 C7.1
  Top Layer w1: v1(53.7,44.9) 55.175,44.9 C29.2 ; C28.2 58.975,22.775 v1(59,22.8) ; C27.2@73.773,44.752 75.752,44.752 v1(75.8,44.8)
  Bottom Layer w1: J1.4 46.1,13.7 ; J2.4 65.25,13.75 65.4,13.9 ; DC1.3 77.5,8 78.6,9.1 DC1.2 ; 82.3,45.7 82.409,45.809 83.809,45.809 P1.2 ; U1.2 83.1,17.65 83.1,16.3
  other v1: 17.5,2.2 12.3,2.5 75.5,3 57.5,4 20.6,5.703 28.7,7.3 61.5,7.5 8.2,8.3 81.5,11.5 10,12.5 31.1,13.5 59.1,17.9 66.8,18 10,18.5 25.395,18.559 70.4,18.7 18.727,19.028 79.5,19.3 74.1,19.4 50.5,19.5 32.8,19.7 80.6,20.7 38.1,21.4 80.6,22.5 28.2,23.4 9.8,24.1 20.5,24.5 69.6,24.9 71.1,24.9 81,25.1 33.3,25.5 76.25,26 69.6,26.1 31.5,26.2 72.6,26.3 77.75,26.5 6.3,27.1 43.1,27.1 16.6,28 70.3,28 37.4,28.8 56.9,28.8 72.5,29.3 50,29.5 31.9,30.2 2.4,31.2 18.9,31.7 15.4,31.9 54.4,32.5 24.8,33.3 36.8,33.6 2.5,33.7 26.8,33.7 41.7,34 16.5,35.7 50.5,36.1 12,37 54.4,37.6 32,38.6 3.4,39.5 6.6,39.6 19.5,40.5 43.3,42.1 12.5,42.2 66.2,42.4 31.9,42.5 61.4,42.6 22.9,43 37.7,43 34,44 11,44.2 39.2,44.9 46.6,45.1 50.4,46.2 61.7,46.9 66.1,46.9 19,47 26,47 42.4,47.5 36.5,49.1 22.5,49.2 2.5,49.8 73.2,50.1 56.1,50.62 9.7,52
  other v2: 25.5,2.7 15,3.453 22.51,13.01 71.1,26.2 32.01,33.51 14.656,39.97 64.01,42.31 44.8,43.2
LED0: IC1.54 R21.2 | length 25.9
  Top Layer w0.2: v1(7.1,42.4) 7.1,41.65 R21.2 ; v1(23.52,40.983) 24.715,40.983 24.792,41.06 25.775,41.06 26.175,41.46 26.983,41.46 27.16,41.283 27.16,40.715 28.052,39.823 28.052,39.36 27.98,39.288 IC1.54
  Bottom Layer w0.2: v1(7.1,42.4) 7.6,42.9 21.603,42.9 v1(23.52,40.983)
M1_ENCA: IC1.58 L.B.3 | length 20.1
  Top Layer w0.2: v1(25.48,40.5) 25.557,40.423 25.557,39.151 25.94,38.767 25.94,38.499 IC1.58
  Bottom Layer w0.2: v1(25.48,40.5) 25.557,40.577 25.557,40.958 26.022,41.423 26.022,42.013 36,51.991 L.B.3
M1_ENCB: IC1.59 L.B.4 | length 20.1
  Top Layer w0.2: v1(24.997,39.767) 24.997,39.152 25.356,38.793 25.356,38.376 IC1.59
  Bottom Layer w0.2: v1(24.997,39.767) 24.997,39.875 24.8,40.072 24.8,41.3 34,50.5 L.B.4
M1_IN1: IC1.38 IC5.21 | length 21.7
  Top Layer w0.2: IC1.38 37.839,37.571 38.099,37.571 38.428,37.9 v1(38.514,37.9) ; IC5.21 48.97,40.93 49.827,40.073 49.827,39.999 50.367,39.459 50.432,39.459 50.938,38.954 v1(51.046,38.954)
  Bottom Layer w0.2: v1(38.514,37.9) 38.622,37.9 38.822,38.1 38.848,38.1 39.648,38.9 43.146,38.9 46.274,35.771 48.438,35.771 48.556,35.888 48.556,37.656 49.854,38.954 v1(51.046,38.954)
M1_IN2: IC1.37 IC5.22 | length 23
  Top Layer w0.2: IC1.37 37.366,36.32 38.386,37.34 38.746,37.34 39.066,37.66 39.092,37.66 39.292,37.86 v1(39.4,37.86) ; IC5.22 50.187,40.53 50.187,40.148 50.515,39.82 51.338,39.82 v1(51.611,39.547)
  Bottom Layer w0.2: v1(39.4,37.86) 39.4,37.9 40.04,38.54 42.996,38.54 46.125,35.411 48.798,35.411 48.916,35.528 48.916,36.116 49.3,36.5 49.3,37.6 49.9,38.2 51.1,38.2 51.572,38.672 51.606,38.672 51.606,39.543 v1(51.611,39.547)
M1_OUT1: IC5.1 IC5.2 L.B.1 | length 6.8
  Top Layer w1.1: L.B.1 40.2,51.8 40.438,51.8 IC5.1@44.9,47.338
M1_OUT2: IC5.5 IC5.6 L.B.6 | length 18
  Top Layer w1.1: L.B.6 30.077,51.923 30.077,49.487 31.544,48.02 32.917,48.02 32.957,47.98 34.543,47.98 39.661,47.98 41.303,46.338 42.025,46.338 43.113,45.25 43.586,44.777
M1_PWM: IC1.42 IC5.23 | length 18.2
  Top Layer w0.2: IC1.42 36.28,38.841 36.28,39.081 37.279,40.08 v1(38.438,40.08) ; IC5.23 50.747,40.89 v1(50.747,40.38)
  Bottom Layer w0.2: v1(38.438,40.08) 38.547,40.08 38.846,40.38 v1(50.747,40.38)
M2_ENCA: IC1.14 R.B.3 | length 31.9
  Top Layer w0.2: IC1.14 29.887,27.543 30.8,28.455 v1(30.8,28.5)
  Bottom Layer w0.2: R.B.3 18,50.8 20.299,48.501 23.299,48.501 24.44,47.36 24.44,40.575 24.437,40.572 24.437,34.863 v1(30.8,28.5)
M2_ENCB: IC1.15 R.B.4 | length 34.4
  Top Layer w0.2: v1(29.2,26.3) 29.277,26.377 29.473,26.377 IC1.15
  Bottom Layer w0.2: R.B.4@16,51.991 19.891,48.1 23.1,48.1 24.08,47.12 24.08,40.724 24.077,40.721 24.077,31.725 26.772,29.029 26.772,28.728 v1(29.2,26.3)
M2_IN1: IC1.39 IC5.17 | length 16.6
  Top Layer w0.2: IC1.39 36.961,37.4 36.961,37.407 37.868,38.314 v1(37.868,38.322) ; IC5.17 47.92,38.201 47.92,36.717 47.642,36.439 v1(47.642,36.331)
  Bottom Layer w0.2: v1(37.868,38.322) 37.944,38.398 38.206,38.398 38.268,38.46 38.699,38.46 39.499,39.26 43.295,39.26 46.424,36.131 46.966,36.131 47.09,36.255 47.565,36.255 v1(47.642,36.331)
M2_IN2: IC1.40 IC5.16 | length 15.8
  Top Layer w0.2: IC1.40 37.123,38.27 37.123,38.623 v1(37.2,38.7) ; IC5.16 47.56,37.642 47.56,37.052 47.276,36.768 46.811,36.768 v1(46.734,36.691)
  Bottom Layer w0.2: v1(37.2,38.7) 37.308,38.7 37.49,38.882 38.611,38.882 39.35,39.62 43.805,39.62 v1(46.734,36.691)
M2_OUT1: IC5.11 IC5.12 R.B.1 | length 22
  Top Layer w1.1: R.B.1 24,52 30.5,45.5 31.873,45.5 31.913,45.46 35.587,45.46 37.04,45.46 39.771,42.729 40.151,42.729
M2_OUT2: IC5.7 IC5.8 R.B.6 | length 35.2
  Top Layer w1.1: R.B.6 12.096,52.096 12.096,53.414 12.681,54 23.782,54 31.022,46.76 32.395,46.76 32.435,46.72 35.065,46.72 39.08,46.72 40.722,45.078 41.446,45.078 41.794,44.73
M2_PWM: IC1.41 IC5.15 | length 14.5
  Top Layer w0.2: IC1.41 36.64,38.494 36.64,38.932 37.073,39.365 37.589,39.365 v1(37.666,39.442) ; IC5.15 46.144,38.173 46.889,37.427 v1(46.923,37.427)
  Bottom Layer w0.2: v1(37.666,39.442) 37.673,39.434 38.655,39.434 39.201,39.98 44.52,39.98 46.503,37.997 46.503,37.855 46.923,37.435 v1(46.923,37.427)
M3_ENCA: IC1.50 R.F.3 | length 50.6
  Top Layer w0.2: v1(28.5,41.8) 28.577,41.723 28.577,41.52 IC1.50
  Bottom Layer w0.2: v1(28.5,41.8) 28.524,41.824 28.524,42.224 36,49.7 69.7,49.7 R.F.3
M3_ENCB: IC1.55 R.F.4 | length 51.5
  Top Layer w0.2: v1(27.026,40.057) 27.056,40.057 27.62,39.493 27.62,38.941 IC1.55
  Bottom Layer w0.2: v1(27.026,40.057) 27.103,40.133 27.552,40.133 27.76,40.341 27.76,41.969 35.851,50.06 68.06,50.06 R.F.4
M3_IN1: IC1.34 IC6.21 | length 33.1
  Top Layer w0.2: IC1.34 38.355,35.318 38.425,35.388 38.555,35.388 39.072,35.905 39.405,35.905 39.658,36.158 39.658,36.3 40.028,36.67 v1(40.028,36.778) ; v1(65.48,34.772) 65.522,34.814 65.522,37.749 IC6.21
  Bottom Layer w0.2: v1(40.028,36.778) 40.105,36.855 40.526,36.855 40.728,37.057 41.11,37.057 41.513,37.46 42.549,37.46 45.678,34.331 61.492,34.331 62.338,35.177 65.037,35.177 65.442,34.772 v1(65.48,34.772)
M3_IN2: IC1.33 IC6.22 | length 33.4
  Top Layer w0.2: IC1.33 38.709,34.991 38.7,35 39.055,35.355 39.647,35.355 v1(40.086,35.794) ; IC6.22 66.214,35.394 66.5,35.108 v1(66.5,35)
  Bottom Layer w0.2: v1(40.086,35.794) 40.568,36.276 40.838,36.276 41.662,37.1 42.4,37.1 45.529,33.971 65.471,33.971 v1(66.5,35)
M3_OUT1: IC6.1 IC6.2 R.F.1 | length 12.8
  Top Layer w1.1: 67.289,45.141 67.289,45.789 69.415,47.915 73.415,47.915 75.5,50 75.5,51.5 R.F.1
M3_OUT2: IC6.5 IC6.6 R.F.6 | length 8.1
  Top Layer w1.1: 64.629,44.272 64.629,44.916 ; 64.629,45.128 64.629,45.972 64.689,46.032 64.689,48.015 66,49.326 R.F.6
M3_PWM: IC1.44 IC6.23 | length 37
  Top Layer w0.2: IC1.44 35.788,39.763 35.907,39.763 35.907,39.901 36.22,40.213 v1(36.22,40.322) ; v1(66.776,36.218) 66.776,37.276 67,37.5 66.989,37.5 66.864,37.625 IC6.23
  Bottom Layer w0.2: v1(36.22,40.322) 37.198,41.3 61.694,41.3 v1(66.776,36.218)
M4_ENCA: IC1.56 L.F.3 | length 36.1
  Top Layer w0.2: v1(26.6,40.7) 26.523,40.623 26.523,40.346 26.466,40.289 26.466,39.825 27.06,39.231 27.06,38.794 IC1.56
  Bottom Layer w0.2: v1(26.6,40.7) 27.057,41.157 27.057,41.775 35.702,50.42 52.42,50.42 L.F.3
M4_ENCB: IC1.57 L.F.4 | length 35
  Top Layer w0.2: v1(26.171,39.328) 26.171,39.322 26.592,38.901 26.592,38.554 IC1.57
  Bottom Layer w0.2: v1(26.171,39.328) 26.171,39.436 26.04,39.567 26.04,40.932 26.579,41.471 26.579,41.807 35.553,50.78 50.78,50.78 L.F.4
M4_IN1: IC1.35 IC6.17 | length 30
  Top Layer w0.2: IC1.35 38.109,35.72 38.18,35.72 38.2,35.7 38.647,36.147 38.689,36.147 39.007,36.465 v1(39.115,36.465) ; v1(60.2,34.891) 60.223,34.868 60.9,34.868 61.158,34.61 61.771,34.61 62.18,35.02 62.18,35.303 62.579,35.702 62.579,35.911 62.674,36.006 62.674,36.306 62.964,36.596 IC6.17
  Bottom Layer w0.2: v1(39.115,36.465) 39.115,36.573 39.468,36.927 39.468,37.01 39.875,37.417 40.961,37.417 41.364,37.82 42.698,37.82 45.827,34.691 52.194,34.691 52.394,34.891 v1(60.2,34.891)
M4_IN2: IC1.36 IC6.16 | length 29.3
  Top Layer w0.2: IC1.36 37.719,35.966 38.733,36.98 38.895,36.98 39.215,37.3 39.692,37.3 39.96,37.568 39.96,37.66 40.269,37.969 v1(40.269,37.977) ; v1(61.62,35.252) 62.219,35.851 62.219,36.06 62.314,36.155 IC6.16
  Bottom Layer w0.2: v1(40.269,37.977) 40.378,37.977 40.58,38.18 42.847,38.18 45.976,35.051 51.94,35.051 52.34,35.451 60.432,35.451 60.631,35.252 v1(61.62,35.252)
M4_OUT1: IC6.11 IC6.12 L.F.1 | length 7.7
  Top Layer w1.1: L.F.1 58,48.267 60.729,45.538 60.729,45.471
M4_OUT2: IC6.7 IC6.8 L.F.6 | length 25.1
  Top Layer w1.1: L.F.6 48.077,52.077 48.077,53.077 49.5,54.5 60,54.5 63.189,51.311 63.189,46.032 63.249,45.972 63.249,45.128 ; 63.249,44.152 63.249,44.916
M4_PWM: IC1.43 IC6.15 | length 31.7
  Top Layer w0.2: IC1.43 35.92,39.188 35.92,39.23 37.326,40.636 37.92,40.636 v1(37.925,40.641) ; v1(61.5,36.002) 61.5,36.678 61.524,36.702 61.524,38 61.539,38 61.664,37.875 IC6.15
  Bottom Layer w0.2: v1(37.925,40.641) 38.034,40.641 38.332,40.94 56.509,40.94 61.447,36.002 v1(61.5,36.002)
MPU_SCL: IC1.61 IC7.23 R20.1 | length 13.6
  Top Layer w0.2: IC7.23 15.446,37.96 15.446,37.054 15.6,36.9 v1(17.4,36.9) ; v1(22.364,38.337) 22.364,38.197 R20.1 23.101,37.46 24.858,37.46 IC1.61
  Bottom Layer w0.2: v1(17.4,36.9) 18.837,38.337 v1(22.364,38.337)
MPU_SDA: IC1.62 IC7.24 R15.1 | length 11.4
  Top Layer w0.2: IC7.24 15.896,37.85 15.946,37.8 18.7,37.8 18.93,38.03 20.535,38.03 20.606,38.101 20.96,38.101 R15.1 21.765,37.295 22.007,37.295 22.597,36.705 24.906,36.705 IC1.62
NetBUZZER1_1: BUZZER1.1 C25.1 | length 4.7
  Top Layer w0.2: C25.1 43.15,23.2 BUZZER1.1
NetC1_1: C1.1 IC1.47 | length 2.3
  Top Layer w0.2: IC1.47 34.944,41.04 35.47,41.04 C1.1
NetC3_1: C3.1 IC2.3 L1.1
NetC3_2: C3.2 R26.2 | length 1.8
  Top Layer w0.2: C3.2 R26.2
NetC6_2: C6.2 IC2.8 R9.1 R10.2 | length 4.5
  Top Layer w0.2: IC2.8 C6.2 78.7,22.2 R9.1 R10.2
NetC14_1: C14.1 IC2.7 | length 3.3
  Top Layer w0.2: IC2.7 74.825,22.223 74.95,22.348 74.95,22.843 75.48,23.373 76.946,23.373 C14.1
NetC15_1: C15.1 IC1.31 | length 2.8
  Top Layer w0.2: IC1.31 38.359,31.741 38.5,31.6 39.54,30.56 39.54,29.53 C15.1
NetC20_1: C20.1 IC7.20 | length 2.1
  Top Layer w0.2: IC7.20 13.896,37.207 14.2,36.903 C20.1
NetC26_2: C26.2 IC7.10 | length 1.9
  Top Layer w0.2: IC7.10 14.396,43.696 C26.2
NetIC2_5: IC2.5 R26.1 | length 2
  Top Layer w0.2: R26.1 73.15,21.475 73.525,21.85 IC2.5
NetIC4_9: IC4.9 R11.1 | length 2.6
  Top Layer w0.2: IC4.9 24.9,12.05 25.418,12.05 25.959,12.591 25.959,12.609 26.75,13.4 R11.1
NetLED1_1: LED1.1 R8.1 | length 1.7
  Top Layer w0.2: R8.1 LED1.1
NetLED1_2: LED1.2 Q5.1 | length 2.7
  Top Layer w0.2: LED1.2 67.4,32.5 68.15,33.25 Q5.1
NetLED2_1: LED2.1 R21.1 | length 1.7
  Top Layer w0.2: LED2.1 R21.1
NetQ1_1: Q1.1 R3.2 R5.2 SW1.1 | length 12
  Top Layer w0.2: R5.2 R3.2 77.85,31.75 78.05,31.55 Q1.1 78.05,30.95 78.25,30.75 78.81,30.75 80.56,29 SW1.1
NetQ5_3: Q5.3 R5.1 | length 5.9
  Top Layer w0.2: Q5.3 70.95,33.076 v1(71.218,33.344) ; R5.1 v1(74.5,34.3)
  Bottom Layer w0.2: v1(71.218,33.344) 73.544,33.344 v1(74.5,34.3)
NetR12_2: R12.2 U3.10 | length 6.6
  Top Layer w0.2: U3.10 12.33,22.08 R12.2
NetR13_2: R13.2 U3.8 | length 6.8
  Top Layer w0.2: U3.8 11.65,17 12.4,17.75 R13.2
NetR14_2: R14.2 U3.6 | length 6.8
  Top Layer w0.2: U3.6 11.94,11.92 12.51,12.49 R14.2
NRST: C2.2 IC1.7 P2.2 R4.1 S1.2 | length 47.8
  Top Layer w0.2: R4.1 7.45,35.25 C2.2 v1(7.5,33.837) ; v1(9.4,45.1) 9.4,46.956 S1.2 ; v1(25.9,28.5) 25.92,28.5 27.393,29.973 IC1.7
  Bottom Layer w0.2: P2.2 6.36,35.04 v1@7.5,33.9 ; v1(9.4,45.1) 9.4,44.5 8.828,43.928 7.836,43.928 7.7,43.792 7.7,43.509 7.151,42.96 6.868,42.96 6.54,42.632 6.54,42.168 6.868,41.84 7.583,41.84 7.7,41.723 7.7,34.108 7.5,33.908 v1@7.5,33.9 ; v1(25.9,28.5) 25.9,29.392 21.492,33.8 7.5,33.8 v1@7.5,33.9
SWCLK: IC1.49 P2.4 | length 52.9
  Top Layer w0.2: v1(7.6,32.3) 7.7,32.3 8.96,33.56 8.96,40.155 9.22,40.415 9.22,42.462 6.88,44.802 6.88,49.281 7.419,49.82 10.771,49.82 13.091,47.5 15.936,47.5 18.236,45.2 25.109,45.2 27.863,42.446 28.646,42.446 29.438,41.654 29.438,41.366 IC1.49
  Bottom Layer w0.2: P2.4 4.4,29.96 4.934,30.494 4.934,30.526 6.468,32.06 6.852,32.06 7.015,32.223 7.523,32.223 v1(7.6,32.3)
SWDIO: IC1.46 P2.3 | length 55.9
  Top Layer w0.2: v1(7,33) 7.077,33.077 7.568,33.077 8.6,34.108 8.6,40.409 8.86,40.669 8.86,42.313 6.52,44.653 6.52,49.43 7.27,50.18 10.92,50.18 13.2,47.9 16.136,47.9 18.421,45.615 25.203,45.615 28.012,42.806 29.368,42.806 29.383,42.821 33.236,38.968 33.508,38.968 34.042,39.502 IC1.46
  Bottom Layer w0.2: P2.3 6.5,32.5 v1(7,33)
UART2_RX: IC1.17 IC4.26 | length 25.4
  Top Layer w0.2: IC4.26 19.158,12.5 18.64,13.018 18.64,15.649 20.191,17.2 26.583,17.2 30.868,21.485 30.868,24.26 32.116,25.508 32.123,25.508 IC1.17
UART2_TX: IC1.16 IC4.25 | length 25.4
  Top Layer w0.2: IC4.25 20.1,13.05 19.117,13.05 19,13.167 19,15.5 20.3,16.8 26.9,16.8 31.7,21.6 v1(31.7,24.3) ; v1(29.9,25.5) 29.9,26.097 IC1.16
  Bottom Layer w0.2: v1(29.9,25.5) 31.1,24.3 v1(31.7,24.3)
UART3_RX: IC1.52 P2.7 | length 53.4
  Top Layer w0.2: P2.7 4.389,29.96 v1(5.41,28.939) ; v1(8.6,31) 8.6,31.691 9.68,32.771 9.68,38.98 9.94,39.24 9.94,42.76 7.6,45.1 7.6,48.983 7.717,49.1 10.473,49.1 12.873,46.7 15.718,46.7 18.009,44.409 24.543,44.409 27.757,41.195 27.757,40.925 IC1.52
  Bottom Layer w0.2: v1(5.41,28.939) 6.939,28.939 8.305,30.305 8.305,30.597 8.6,30.892 v1(8.6,31)
UART3_TX: IC1.51 P2.8 | length 53.1
  Top Layer w0.2: P2.8 3.65,32.5 5.65,30.5 v1(5.7,30.5) ; v1(8.022,31.668) 8.068,31.668 9.32,32.92 9.32,39.72 9.58,39.98 9.58,42.611 7.24,44.951 7.24,49.132 7.568,49.46 10.622,49.46 12.952,47.13 15.797,47.13 18.127,44.8 25,44.8 27.94,41.86 27.94,41.568 28.674,40.834 28.683,40.834 29.417,40.099 29.417,40.043 29.887,39.573 IC1.51
  Bottom Layer w0.2: v1(5.7,30.5) 6.854,30.5 v1(8.022,31.668)
USB_D_N: IC4.5 U2.2 USB1.A7 USB1.B7 | length 18.9
  Top Layer w0.2: USB1.B7 14.3,8.497 14.3,7.755 14.492,7.562 15.008,7.562 15.2,7.755 15.2,8.497 USB1.A7 15.3,8.497 15.3,7.755 15.3,7.562 15.483,7.562 15.483,7.516 17.069,5.93 19.808,5.93 22.359,8.481 ; IC4.5 22.95,10.6 22.95,9.072 22.359,8.481 ; U2.2@24.85,5.896 24.857,5.902 24.857,6.543 24.231,7.169 23.785,7.169 23.131,7.823 23.017,7.823 22.997,7.843 22.997,7.848 22.862,7.984 22.857,7.984 22.359,8.481
USB_D_P: IC4.4 U2.3 USB1.A6 USB1.B6 | length 19.4
  Top Layer w0.2: USB1.A6 14.8,8.597 14.8,9.34 14.992,9.532 15.508,9.532 15.665,9.375 15.665,7.946 15.66,7.941 15.66,7.901 15.7,7.901 15.84,7.761 15.84,7.715 17.232,6.323 19.645,6.323 20.637,7.315 20.637,7.325 v1@22.181,8.868 ; v1(22,9) 22.049,9 v1@22.181,8.868 ; IC4.4 22.55,10.6 22.55,9.238 v1@22.181,8.868 ; v1(23.5,8.383) 23.5,8.355 24.049,7.806 24.494,7.806 25.493,6.807 25.493,5.682 U2.3
  Bottom Layer w0.2: v1(22,9) 22.75,8.25 23.183,8.25 23.22,8.287 23.404,8.287 v1(23.5,8.383)
USB_VBUS: C4.2 C6.1 C7.2 C19.1 C28.1 IC3.1 IC3.3 IC4.7 IC4.8 J1.1 J2.1 L1.2 R8.2 R9.2 U2.1 USB1.A4B9 USB1.B4A9 | length 152.9
  Top Layer w0.2: v1(10.043,28.153) 11.003,28.153 IC3.1 ; IC3.3 13.05,28.1 v1(13.8,28.1) ; v1(22.6,7.2) 23.59,6.21 24.1,6.21 24.2,6.11 U2.1 ; IC4.7 24,10.35 24.05,10.3 v1(25.1,10.3) 25.1,10.408 24.85,10.658 IC4.8 26.35,11.5 26.8,11.95 C19.1 ; J2.1 58.75,11.5 61.286,11.5 62.2,12.414 62.2,14.2 62.964,14.964 66.814,14.964 69.05,17.2 70.9,17.2 72.1,18.4 74.8,18.4 77.2,20.8 C6.1 77.3,20.75 R9.2 ; 60.716,27.9 60.75,27.934 R8.2
  Top Layer w0.4: IC3.1 11.05,26.8 11.3,26.55 C7.2 11.3,26.45 12.309,25.441 13.273,25.441 14.288,24.426 14.288,10.092 ; U2.1 24.2,4.597 24.382,4.415
  Top Layer w0.6: USB1.B4A9 17.45,9.373 16.73,10.092 14.288,10.092 13.269,10.092 12.55,9.373 USB1.A4B9 12.55,7.722 15.172,5.1 20.058,5.1 20.443,4.715 22.652,4.715 22.952,4.415 24.382,4.415 24.427,4.46 26.573,4.46 26.618,4.415 27.967,4.415 28.152,4.6 32.5,4.6 37.93,10.03 J1.1
  Top Layer w1.5: J1.1 40.73,16.5 54,16.5 ; J2.1 56.5,14 54,16.5 ; L1.2 60.716,27.9 58.8,27.9 58,27.1 57.325,27.1 57.3,27.075 57.3,26.175 54,22.875 54,16.5
  Bottom Layer w0.2: v1(10.043,28.153) 10.096,28.1 v1(13.8,28.1) ; v1(22.6,7.2) 23.7,7.2 25.1,8.6 v1(25.1,10.3)
V_SYS: C5.2 C27.1 C29.1 IC2.2 IC2.6 IC5.13 IC5.14 IC5.24 IC6.13 IC6.14 IC6.24 P1.1 Q1.3 R1.2 SW1.3 Z1.1 | length 80.9
  Top Layer w0.2: IC5.13 45.96,36.485 45.96,34.601 R1.2 ; IC2.6 74.175,23.175 74.825,23.825 IC2.2
  Top Layer w0.5: IC6.24 67.514,39.909 67.605,40
  Top Layer w1.2: Z1.1 74.57,36.5 72.8,34.73 72.8,31.303 74.156,29.947 74.403,29.947 76.15,28.2 C5.2
  Top Layer w1.8: IC5.13 44,38.444 44,39 48.608,43.608 49.892,43.608 53.5,40 60.5,40 ; IC6.13 60.364,39.864 60.5,40 ; C27.1 C27.1@73.9,41.096 ; C27.1@73.925,40 67.605,40 60.5,40 ; Z1.1 C27.1@74.6,39.75 ; Z1.1@75,36.398 76.738,34.66 77.548,34.66 78.458,33.75 81.625,33.75 82.375,33 ; 83.075,33 SW1.3
  Bottom Layer w1.8: P1.1 84,40.946 83.9,40.846 83.9,40.759 82.84,39.699 82.84,34.414 84.254,33 SW1.3
VBAT: DC1.1 Q1.2 R3.1 SW1.2 U1.1 | length 35.8
  Top Layer w0.2: R3.1 77.318,33.25 79.568,31 Q1.2@79.95,31
  Top Layer w1.8: Q1.2 80.2,31 SW1.2
  Bottom Layer w1.8: DC1.1 74.1,14.44 77.559,14.44 78.619,15.5 79.846,15.5 80.822,16.477 80.822,18.595 81.799,19.572 82.322,19.572 U1.1 84.2,21.45 84.2,24.753 82.84,26.113 82.84,29.417 84.423,31 SW1.2
XALT_N: C18.2 IC1.6 Y1.3 | length 11.5
  Top Layer w0.2: C18.2 25.95,23.15 23.446,23.15 23.26,23.336 23.26,26.652 25.668,29.06 25.722,29.06 26.988,30.327 IC1.6
XALT_P: C17.1 IC1.5 Y1.1 | length 13.2
  Top Layer w0.2: C17.1 21.75,21.8 Y1.1 22,21.65 23.057,22.707 23.057,22.973 22.86,23.17 22.86,26.818 25.502,29.46 25.556,29.46 26.705,30.609 IC1.5
pads on no net: IC1.24 IC1.25 IC1.26 IC1.29 IC1.30 IC1.45 IC1.53 IC3.4 IC4.1 IC4.2 IC4.10 IC4.11 IC4.12 IC4.13 IC4.14 IC4.15 IC4.16 IC4.17 IC4.18 IC4.19 IC4.20 IC4.21 IC4.22 IC4.23 IC4.24 IC4.27 IC4.28 IC7.2 IC7.3 IC7.4 IC7.5 IC7.6 IC7.7 IC7.12 IC7.14 IC7.15 IC7.16 IC7.17 IC7.19 IC7.21 IC7.22 J1.2 J1.3 J2.2 J2.3 U2.4 U2.7 USB1. USB1.A5 USB1.A8 USB1.B5 USB1.B8

## Polygon pours and split planes (outlines as drawn)
GND on Top Layer "GND_L01_P004" (solid, remove dead copper, pour order 4): 1,3 1,56 3,58 85,58 87,56 87,3 85,1 3,1
USB_VBUS on Top Layer "NONET_L-01_P-001" (solid, remove dead copper, pour order 3): 62.575,29.225 62.575,26.475 65.775,26.475 66.4,27.1 69.375,27.1 69.375,28.8 66.2,28.8 65.775,29.225
NetC3_1 on Top Layer "NONET_L-01_P-001" (solid, remove dead copper, pour order 2): 67.925,20.725 68.825,21.625 71,21.625 71,22.163 71.737,22.9 73.7,22.9 74.4,23.6 74.4,25.375 73.95,25.375 73.95,24.225 68.35,24.225 67.6,23.475 64.4,23.475 64.4,20.725
V_SYS on Top Layer "NONET_L-01_P-001" (solid, remove dead copper, pour order 1): 74.25,28.2 74.9,28.85 76.7,28.85 76.7,27.15 76.65,27.15 75.05,25.55 75.05,24.225 74.6,24.225 74.6,25.685 74.25,26.035
GND on Top Layer "NONET_L-01_P-001" (solid, remove dead copper, pour order 0): 73.75,25.535 74.25,26.035 74.25,28.85 72.8,28.85 71.103,28.85 71.103,27.153 71.1,27.15 71.25,27.15 73.3,25.1 73.3,24.225 73.75,24.225
GND on Bottom Layer "GND_L02_P005" (solid, remove dead copper, pour order 5): 1,3 1,56 3,58 85,58 87,56 87,3 85,1 3,1

## Keep-outs
Keep-Out Layer:
  circle w0.2: c83,54 r2.25
  circle w0.2: c5,54 r2.25
  circle w0.2: c83,5 r2.25
  circle w0.2: c5,5 r2.25
  lines w0.2: 1,3 3,1 85,1 87,3 87,56 85,58 3,58 1,56 ; 1,3.5 1,56.5

## Silkscreen, mask and mechanical layers (free items; w line width, h text height)
Top Overlay:
  circle w0.2: c5,5 r3.25
  circle w0.2: c5,54 r3.25
  circle w0.2: c83,54 r3.25
  circle w0.2: c83,5 r3.25